# EAGLE board polyvoks_vcf (EAGLE 7.1.0)
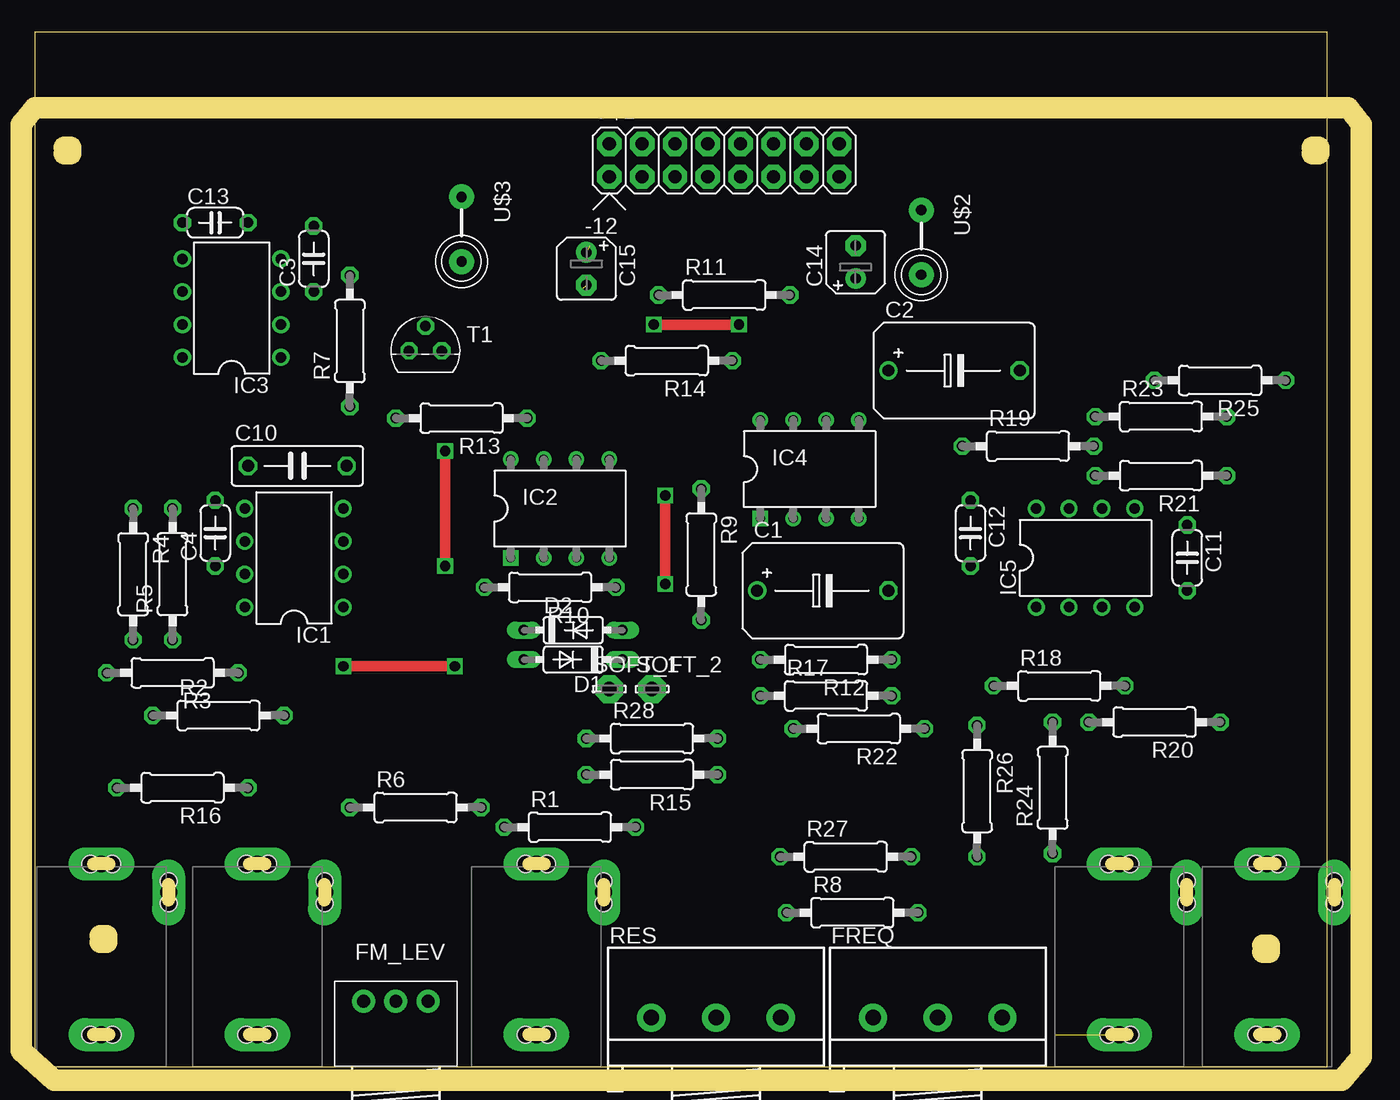
[diagram p0: board, top side]
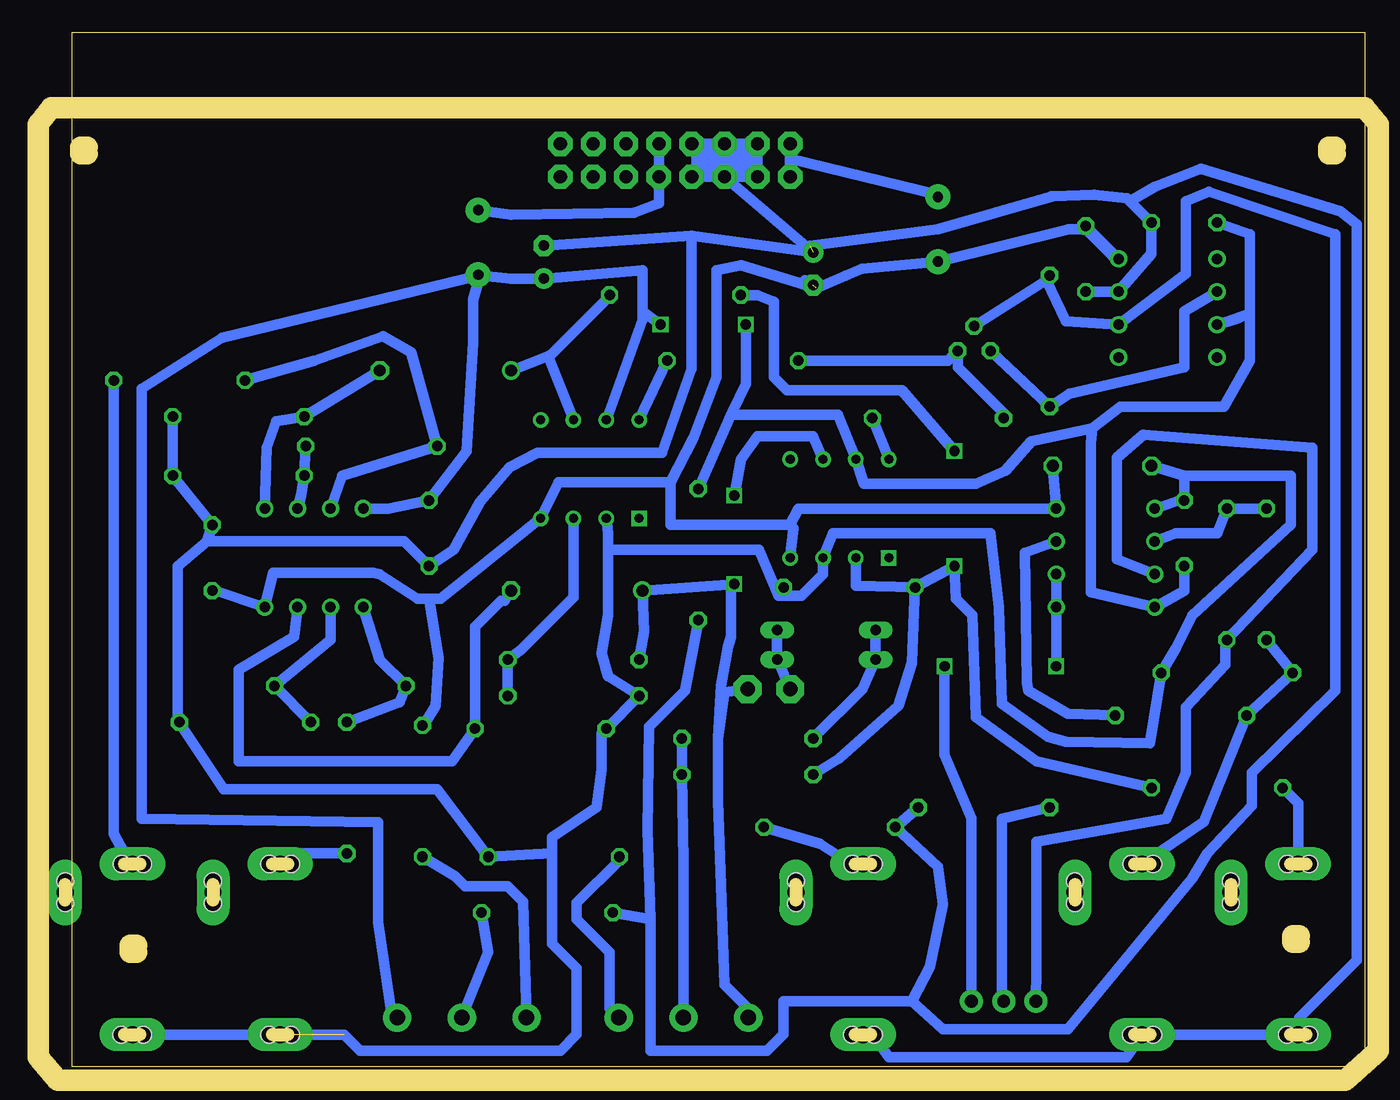
[diagram p1: board, bottom side, seen from below]

Size 100 x 80 mm. Coordinates in mm from the lower left corner, seen from the top.
Outline: 0,0 100,0 100,80 0,80 0,0
Copper layers (1*16): Top 0.035mm / dielectric 1.5mm / Bottom 0.035mm
Design rules "default *": minimum track width 32mil, minimum drill 31mil, track to track 18mil, track to pad 18mil, pad to pad 18mil, via to via 18mil, smd to smd 8mil, copper to edge 0mil, drill to drill 16mil, minimum pad ring 10mil, minimum via ring 8mil, stop-mask expansion 4mil, vias tented up to drill 0mil, thermal gap 10mil
Milling: 20 lines

## Footprints (pad centres in the part's own frame; a part is rotated, then mirrored left to right if it is on the bottom)
ERTHENVAR-JACK-90DEG = drill 1.3 pad 2.54 long: P$1 5,-2.5; P$2 -0.2,-13.5; P$3 5,-15.7 | hole 1.3: 5.842,-2.489; 4.14,-2.489; -0.203,-12.649; -0.203,-14.351; 5.842,-15.697; 4.166,-15.697
B45181C = drill 0.914: + -5.08,0 | drill 0.914 octagon: - 5.08,0
C050-024X044 = drill 0.813 octagon: 1 -2.54,0; 2 2.54,0
C075-032X103 = drill 0.914 octagon: 1 -3.81,0; 2 3.81,0
B45181A = drill 0.813 pad 1.6: + -1.27,0 | drill 0.813 pad 1.6 octagon: - 1.27,0
DO35-7 = drill 0.813 long: A 3.81,0; C -3.81,0
PTD901 = drill 1 pad 1.778: 1 -2.485,0; 2 0,0; 3 2.485,0
3RP/1610N = drill 1.2 pad 2.184: 1 -5,0; 2 0,0; 3 5,0
DIL08 = drill 0.813 pad 1.27: 1 -3.81,-3.81; 2 -1.27,-3.81; 3 1.27,-3.81; 4 3.81,-3.81; 5 3.81,3.81; 6 1.27,3.81; 7 -1.27,3.81; 8 -3.81,3.81
DIL08' = drill 0.7 square: 1 -3.81,-3.81 | drill 0.7: 2 -1.27,-3.81; 3 1.27,-3.81; 4 3.81,-3.81; 5 3.81,3.81; 6 1.27,3.81; 7 -1.27,3.81; 8 -3.81,3.81
0207/10 = drill 0.813 octagon: 1 -5.08,0; 2 5.08,0
LSP11 = drill 1.118 pad 2.159 octagon: MP 0,0
TO92 = drill 0.813 octagon: 1 1.27,0; 2 0,1.905; 3 -1.27,0
POWER_16 = drill 1.016 pad 1.88 octagon: 1 -6.35,-1.27; 2 -6.35,1.27; 3 -3.81,-1.27; 4 -3.81,1.27; 5 -1.27,-1.27; 6 -1.27,1.27; 7 1.27,-1.27; 8 1.27,1.27; 9 3.81,-1.27; 10 3.81,1.27; 11 6.35,-1.27; 12 6.35,1.27; 13 8.89,-1.27; 14 8.89,1.27; 15 11.43,-1.27; 16 11.43,1.27
FB = drill 0.8 pad 1.93: P$1 -2.5,0; P$2 2.5,0

## Placement (x,y rotation side)
BP_OUT  AUDIO-JACK  [ERTHENVAR-JACK-90DEG]  88.9,0 180 top
C1  1uF  [B45181C]  60.96,36.83 0 top
C2  1uF  [B45181C]  71.12,53.85 0 top
C3  100n  [C050-024X044]  21.59,62.48 90 top
C4  100n  [C050-024X044]  13.97,41.27 90 top
C10  100n  [C075-032X103]  20.32,46.48 0 top
C11  100n  [C050-024X044]  89.15,39.37 270 top
C12  100n  [C050-024X044]  72.39,41.27 270 top
C13  100n  [C050-024X044]  13.97,65.28 0 top
C14  10u  [B45181A]  63.5,62.23 90 top
C15  10u  [B45181A]  42.67,61.72 270 top
CV_IN  AUDIO-JACK  [ERTHENVAR-JACK-90DEG]  43.81,0 180 top
D1  1N4148DO35-7  [DO35-7]  41.66,31.5 180 top
D2  1N4148DO35-7  [DO35-7]  41.66,33.78 0 top
FM_IN  AUDIO-JACK  [ERTHENVAR-JACK-90DEG]  22.23,0 180 top
FM_LEV  47k lin  [PTD901]  27.94,5.08 0 top
FREQ  100k  [3RP/1610N]  69.85,3.81 0 top
IC1  TL072P  [DIL08]  20.07,39.37 90 top
IC2  LM4250P  [DIL08']  40.64,43.18 0 top
IC3  TL071P  [DIL08]  15.24,58.67 90 top
IC4  LM4250P  [DIL08']  59.94,46.23 0 top
IC5  TL072P  [DIL08]  81.28,39.37 0 top
INPUT  AUDIO-JACK  [ERTHENVAR-JACK-90DEG]  10.16,0 180 top
LP_OUT  AUDIO-JACK  [ERTHENVAR-JACK-90DEG]  100.33,0 180 top
R1  100k  [0207/10]  41.4,18.54 0 top
R2  10k  [0207/10]  14.22,27.18 0 top
R3  220k  [0207/10]  10.67,30.48 180 top
R4  100k  [0207/10]  7.62,38.1 270 top
R5  100k  [0207/10]  10.67,38.1 90 top
R6  120k  [0207/10]  29.46,20.07 0 top
R7  3k  [0207/10]  24.38,56.13 90 top
R8  162k  [0207/10]  63.25,11.94 0 top
R9  100k  [0207/10]  51.56,39.62 270 top
R10  1k  [0207/10]  39.88,37.08 180 top
R11  47k  [0207/10]  53.34,59.69 0 top
R12  47k  [0207/10]  61.21,31.5 180 top
R13  1M2  [0207/10]  33.02,50.16 180 top
R14  1M2  [0207/10]  48.9,54.61 180 top
R15  27k  [0207/10]  47.75,22.61 180 top
R16  470k  [0207/10]  11.43,21.59 180 top
R17  1k  [0207/10]  61.21,28.7 0 top
R18  100k  [0207/10]  79.25,29.46 0 top
R19  100k  [0207/10]  76.83,48.01 0 top
R20  10k  [0207/10]  86.61,26.67 180 top
R21  10k  [0207/10]  87.12,45.72 180 top
R22  100k  [0207/10]  63.75,26.16 180 top
R23  100k  [0207/10]  87.12,50.29 0 top
R24  1k  [0207/10]  78.74,21.59 90 top
R25  1k  [0207/10]  91.69,53.09 180 top
R26  47k  [0207/10]  72.9,21.34 270 top
R27  100R  [0207/10]  62.74,16.26 0 top
R28  470R  [0207/10]  47.75,25.4 0 top
RES  100k  [3RP/1610N]  52.7,3.81 0 top
SOFT_1  LSP11  [LSP11]  44.45,29.21 0 top
SOFT_2  LSP11  [LSP11]  47.75,29.21 0 top
T1  2N3904  [TO92]  30.23,55.37 0 top
U$1  POWER  [POWER_16]  50.8,70.1 0 top
U$2  FB  [FB]  68.58,63.75 270 top
U$3  FB  [FB]  33.02,64.77 270 top

## Library data of the parts
BP_OUT CV_IN FM_IN INPUT LP_OUT = erthenvar
C1-C4 C10-C15 R1-R28 = rcl
D1 D2 = diode
FM_LEV = bourns_ptd
FREQ RES = pot
IC1 IC3 IC5 = linear
IC2 IC4 = LM4250
SOFT_1 SOFT_2 = solpad
T1 = transistor
U$1 = eurorack
U$2 U$3 = adafruit

## Nets
+12V: C4.1 C12.1 C13.1 C14.+ FREQ.3 IC1.8 IC2.7 IC3.7 IC4.7 IC5.8 R9.1 U$2.P$2
-12V: C3.2 C10.2 C11.2 C15.- IC1.4 IC2.4 IC3.4 IC4.4 IC5.4 R26.1 U$3.P$2
N$1: IC1.3 R2.2
N$2: FM_LEV.3 IC1.1 IC1.2
N$3: FM_IN.P$3 R2.1 R3.2 R4.2
N$4: FREQ.2 R8.2
N$5: CV_IN.P$3 R1.2
N$6: FM_LEV.1 IC1.7 R5.1
N$7: IC1.6 R4.1 R5.2
N$8: BP_OUT.P$3 R24.1
N$9: FM_LEV.2 R6.1
N$10: IC2.2 R10.2 R11.1 R15.2 R16.1
N$11: C2.+ IC4.6 R11.2
N$12: R15.1 R28.2 RES.2
N$13: C1.+ IC2.6 R12.2 RES.1 SOFT_2.MP
N$14: IC3.2 R1.1 R6.2 R7.2 R8.1 R9.2 T1.2
N$15: IC3.6 R7.1 T1.3
N$16: IC4.3 R12.1 R17.2
N$17: R13.2 R14.2 T1.1
N$18: IC2.8 R13.1
N$19: IC4.8 R14.1
N$20: INPUT.P$3 R16.2
N$21: C1.- IC5.3 R22.1
N$22: IC5.2 R18.2 R20.2
N$23: C2.- IC5.5 R23.1
N$24: IC5.6 R19.2 R21.2
N$25: U$1.9 U$1.10 U$2.P$1
N$26: U$1.1 U$1.2 U$3.P$1
N$27: IC5.7 R19.1 R25.2
N$28: LP_OUT.P$3 R25.1
N$29: IC5.1 R18.1 R24.2
N$30: BP_OUT.P$1 C3.1 C4.2 C10.1 C11.1 C12.2 C13.2 C14.- C15.+ CV_IN.P$1 FM_IN.P$1 IC1.5 IC2.3 IC3.3 IC4.2 INPUT.P$1 LP_OUT.P$1 R3.1 R10.1 R17.1 R20.1 R21.1 R22.2 R23.2 R27.2 U$1.3 U$1.4 U$1.5 U$1.6 U$1.7 U$1.8
N$31: R27.1 RES.3
N$32: D1.A D2.C R28.1
N$33: D1.C D2.A SOFT_1.MP
N$34: FREQ.1 R26.2

## Tracks (layer width: path | path; a pad name or v marks a point on that pad's centre or on a via)
+12V  (via drill 0.8)
  Top 0.813: v47.88,57.4 v54.48,57.4
  Bottom 0.813: 49.02,50.42 40.77,50.42 IC2.7 38.73,45.09 30.1,45.09 27.81,46.1 25.78,48.39 21.08,49.4 | R9.1 49.02,50.42 | C4.1 13.97,36.83 IC1.8 21.21,36.7 21.21,48.26 21.08,49.4 | 8.89,58.29 IC3.7 9.78,57.91 8.89,58.29 | 8.89,58.29 8.89,64.39 C13.1 | 8.89,58.29 8.89,54.61 10.92,51.05 18.92,51.05 21.08,49.4 | IC5.8 75.56,43.18 C12.1 69.47,47.62 68.96,56.01 68.96,59.31 68.45,61.21 | IC4.7 55.88,57.78 55.88,58.42 | 55.88,58.42 55.88,61.59 C14.+ 66.04,60.96 68.58,61.21 | 68.58,61.21 68.45,61.21 | 68.45,61.21 88.39,56.39 94.61,52.45 94.61,19.18 76.33,18.92 76.33,11.18 75.18,3.56 74.93,3.81 FREQ.3 | 68.58,61.21 U$2.P$2 68.45,61.21 | 49.02,50.42 48.9,50.67 47.88,52.83 v47.88,57.4 | v54.48,57.4 55.88,58.42
-12V  (1 unrouted)
  Bottom 0.813: IC2.4 44.2,41.66 44.45,41.91 | 44.45,41.91 43.81,43.18 IC1.4 24.13,46.23 C10.2 | C3.2 IC3.4 19.3,62.48 21.59,64.77 22.9,64.77 U$3.P$2 38.9,61.72 40.17,61.17 42.42,60.2 48.26,61.98 50.16,61.59 50.16,53.34 51.94,48.64 53.72,45.21 | C11.2 88.9,36.83 IC5.4 84.45,38.23 76.71,38.23 76.2,38.1 73.28,36.2 72.39,36.2 | 53.72,45.21 62.36,45.21 IC4.4 66.17,40.51 71.5,36.2 72.39,36.2 | C15.- 43.31,60.83 | 44.45,41.91 53.72,41.91 53.72,45.21 | R26.1 72.64,26.67 71.88,27.94 71.63,31.62 72.39,36.2
N$1
  Bottom 0.813: R2.2 22.99,27.3 26.04,29.08 26.16,29.72 26.29,39.75 IC1.3
N$2  (via drill 0.8)
  Top 0.813: v32.51,30.99 v23.88,30.99
  Bottom 0.813: IC1.2 IC1.1 v23.88,30.99 | FM_LEV.3 30.43,19.25 32.51,24.13 v32.51,30.99
N$3
  Bottom 0.813: R4.2 R3.2 R2.1 12.45,18.95 FM_IN.P$3
N$4
  Bottom 0.813: R8.2 67.82,8.89 FREQ.2
N$5
  Bottom 0.813: CV_IN.P$3 38.86,15.14 42.16,17.27 R1.2
N$6
  Bottom 0.813: FM_LEV.1 25.4,7.62 25.4,17.4 15.37,19.18 13.84,22.73 13.84,27.81 10.79,31.11 10.79,32.38 R5.1 4.06,40.01 4.06,47.88 17.14,48.9 19.18,47.12 19.18,39.24 IC1.7
N$7
  Bottom 0.813: R4.1 R5.2 11.43,41.27 14.61,41.27 IC1.6
N$8
  Bottom 0.813: R24.1 83.09,16.51 BP_OUT.P$3
N$9
  Bottom 0.813: R6.1 28.07,19.18 28.07,5.71 FM_LEV.2
N$10  (via drill 0.8)
  Top 0.813: v31.75,47.62 v31.75,38.73
  Bottom 0.813: R10.2 39.37,37.21 IC2.2 | R16.1 25.4,23.62 30.1,27.05 30.35,34.92 31.62,36.2 v31.75,38.73 R10.2 | R11.1 46.99,59.69 45.72,59.18 45.72,53.34 44.7,52.32 35.81,52.32 v31.75,47.62 | R15.2 40.64,23.88 36.07,27.94 35.05,31.24 R10.2
N$11
  Bottom 0.813: C2.+ 63.12,54.99 63.15,54.88 | 63.15,54.88 IC4.6 | R11.2 58.42,59.61 63.15,54.88
N$12
  Bottom 0.813: RES.2 52.7,15.88 R15.1 R28.2
N$13  (via drill 0.8)
  Top 0.813: v48.77,44.2 v48.77,37.34
  Bottom 0.813: R12.2 55.75,33.66 C1.+ v48.77,37.34 49.02,37.08 49.02,33.27 49.28,32.51 49.78,29.46 50.04,25.4 | IC2.6 42.67,48.77 46.99,48.77 48.26,46.99 v48.77,44.2 | RES.1 47.7,4.53 49.53,6.35 50.04,20.57 50.04,25.4 | 50.04,25.4 49.53,28.96 SOFT_2.MP
N$14
  Bottom 0.813: R7.2 24.64,60.83 | 24.64,60.83 23.11,57.66 IC3.2 13.84,61.34 13.84,66.93 12.06,67.69 2.29,64.39 2.29,29.08 8.76,22.73 8.76,20.19 12.19,16.51 13.34,14.61 22.99,2.92 32.64,2.92 35.05,5.08 | 24.64,60.83 T1.2 | R9.2 52.58,29.08 55.37,26.29 55.5,18.29 55.24,11.43 | 55.24,11.43 55.24,1.27 46.23,1.27 44.96,2.54 44.96,5.08 35.05,5.08 | R8.1 55.24,11.43 | R6.2 R1.1 33.02,15.49 32.64,12.57 33.66,7.75 35.05,5.08
N$15
  Bottom 0.813: T1.3 R7.1 22.86,52.07 13.97,54.1 13.97,58.42 IC3.6
N$16
  Bottom 0.813: R17.2 R12.1 65.28,32.26 61.21,36.32 IC4.3
N$17
  Bottom 0.813: R13.2 27.94,50.55 31.5,54.1 T1.1 32.26,54.61 R14.2
N$18
  Bottom 0.813: R13.1 IC2.8
N$19
  Bottom 0.813: R14.1 IC4.8
N$20
  Bottom 0.813: INPUT.P$3 5.16,20.4 R16.2
N$21
  Bottom 0.813: C1.- 66.55,36.07 66.8,36.07 68.83,34.04 R22.1 70.61,23.62 87.12,23.62 87.12,30.73 82.8,33.27 IC5.3
N$22
  Bottom 0.813: IC5.2 80.01,33.02 R18.2 R20.2
N$23
  Bottom 0.813: IC5.5 84.96,47.88 84.2,49.91 R23.1 C2.-
N$24
  Bottom 0.813: R19.2 R21.2 82.3,44.2 IC5.6
N$25
  Bottom 0.813: U$1.10 U$1.9 54.61,66.8 56.52,66.04 66.04,65.91 U$2.P$1
N$26
  Bottom 0.813: 44.45,70.23 U$1.1 | 44.45,70.23 33.02,67.44 U$3.P$1 | U$1.2 44.45,70.23
N$27
  Bottom 0.813: IC5.7 79.12,45.72 R19.1 73.79,55.24 75.95,56.52 81.28,54.61 R25.2
N$28
  Bottom 0.813: R25.1 96.77,18.03 95.25,15.24 95.25,15.62 LP_OUT.P$3
N$29
  Bottom 0.813: IC5.1 76.2,31.5 R18.1 74.68,28.19 R24.2
N$30  (2 unrouted)
  Bottom 0.813: IC4.2 58.55,41.27 58.55,40.01 | 58.55,40.01 58.55,34.92 59.05,32 58.55,30.23 R17.1 R22.2 59.05,25.78 59.05,22.99 59.44,20.07 62.87,17.78 62.87,16.51 | C10.1 13.97,45.72 | 13.97,45.72 5.71,45.72 5.71,41.91 13.34,34.92 14.61,32.38 R3.1 16.64,25.02 23.11,25.15 24.51,25.53 28.07,28.07 28.32,35.56 28.96,41.27 41.15,41.27 IC2.3 41.91,38.1 43.56,36.45 45.34,36.45 | 13.97,45.72 13.97,43.94 | 13.97,43.94 C4.2 | 13.97,43.94 IC1.5 | R10.1 45.34,36.45 | 58.55,40.01 46.86,40.01 45.34,36.45 | C3.1 IC3.3 16.51,62.87 C13.2 18.16,66.93 | 52.07,64.26 C15.+ U$1.5 | U$1.5 U$1.3 U$1.4 U$1.6 U$1.8 | U$1.5 U$1.7 | 24.26,67.31 24.13,67.31 | 24.13,67.31 20.95,67.44 18.41,67.18 18.16,66.93 | 89.53,40.64 74.3,40.64 C12.2 70.48,40.01 68.45,43.69 66.17,46.35 64.01,47.5 54.36,47.5 52.07,53.98 52.07,64.26 | 89.53,40.64 C11.1 R21.1 R23.2 | 91.82,26.8 R20.1 | 91.82,26.8 91.82,38.73 89.53,40.64 | 52.07,64.26 C14.- | 62.87,16.51 62.87,9.53 60.96,7.62 60.96,2.54 62.23,1.27 77.72,1.27 78.95,2.5 LP_OUT.P$1 | 91.82,26.8 88.27,21.46 71.75,21.46 R27.2 62.87,16.51 | INPUT.P$1 FM_IN.P$1 | FM_IN.P$1 5.12,2.5 5.08,2.54 5.08,3.81 0.64,8.26 0.64,65.15 1.91,66.17 12.7,69.47 16.26,68.07 18.16,66.93 | CV_IN.P$1 38.06,2.5 36.83,0.76 18.45,0.76 FM_IN.P$1 | 42.93,63.5 33.02,64.77 24.13,67.31
N$31
  Bottom 0.813: R27.1 57.66,16 60.96,12.7 60.96,11.43 58.42,8.89 58.42,4.53 RES.3
N$32
  Bottom 0.813: R28.1 38.86,29.21 D1.A D2.C
N$33
  Bottom 0.813: D2.A D1.C 45.21,30.99 SOFT_1.MP
N$34
  Bottom 0.813: FREQ.1 65.1,12.78 66.29,13.97 69.6,13.97 70.36,14.73 R26.2
(copper drawn outside any net)
  shapes: Bottom area x1